# EAGLE board Tube Screamer (EAGLE 9.6.2)
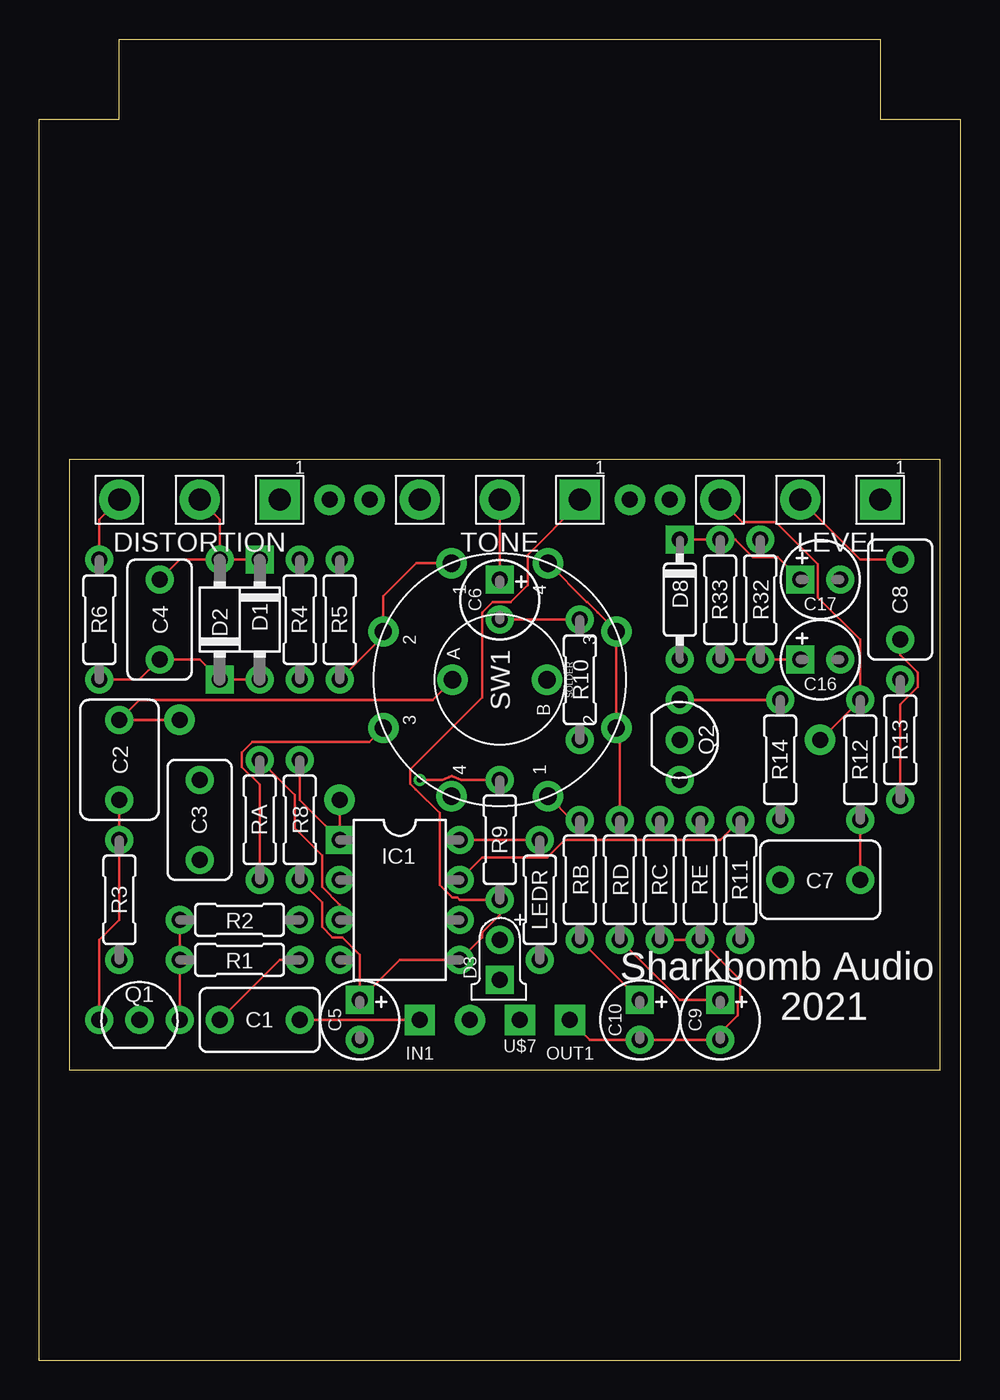
[diagram p0: board, top side]
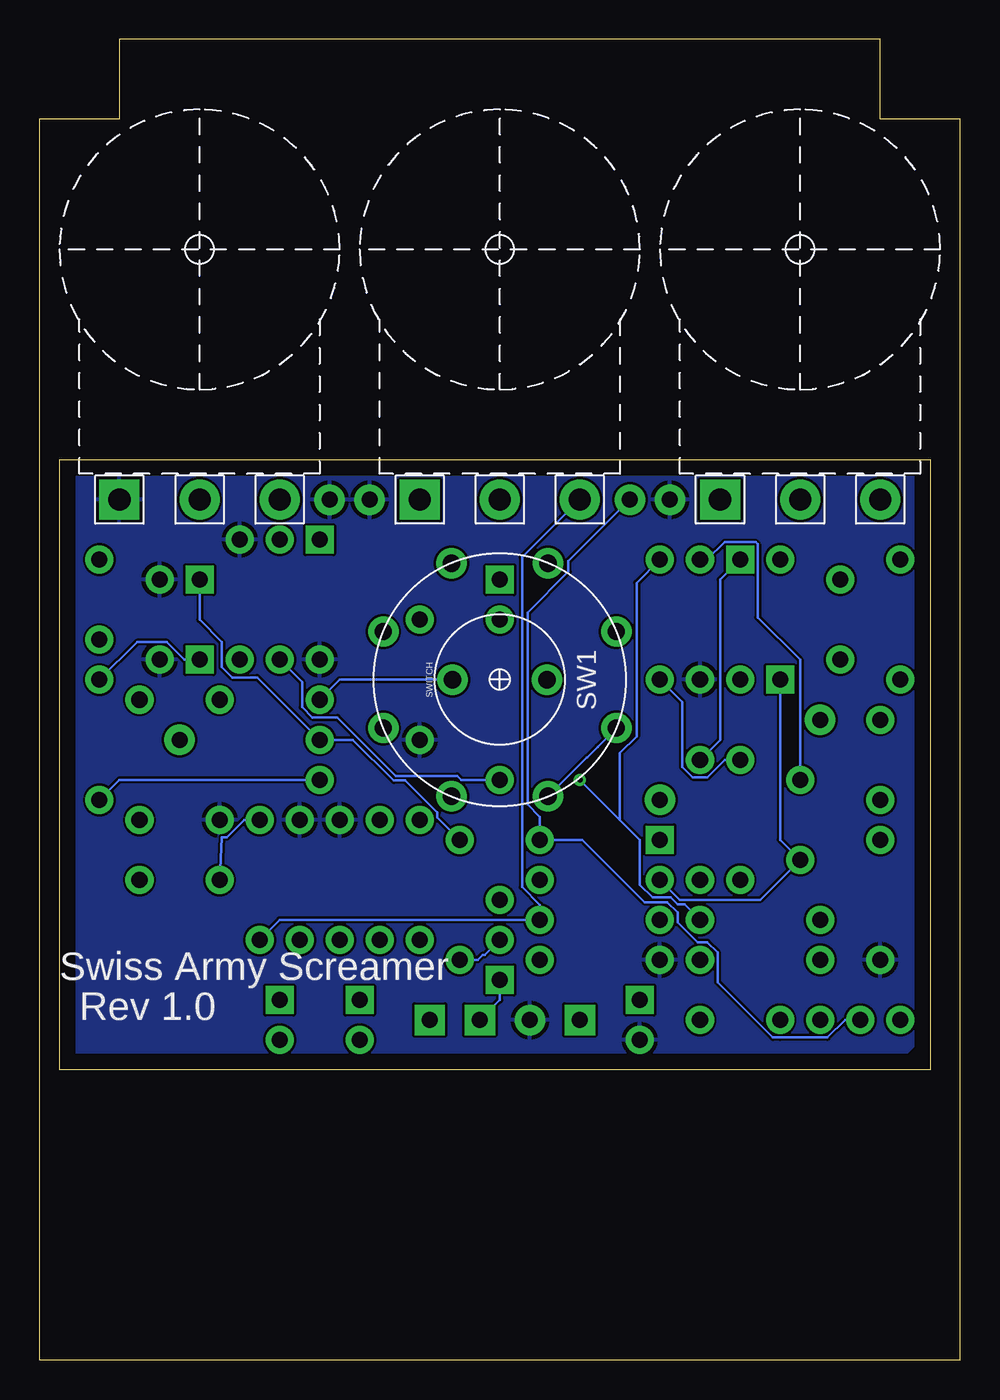
[diagram p1: board, bottom side, seen from below]

Size 55.23 x 38.73 mm. Coordinates in mm from the lower left corner, seen from the top.
Outline: 0,0 55.23,0 55.23,38.73 0,38.73 0,0
Copper layers (1*16): Top 0.035mm / dielectric 1.5mm / Bottom 0.035mm
Design rules "default": minimum track width 6mil, minimum drill 0.35mm, track to track 6mil, track to pad 6mil, pad to pad 6mil, via to via 6mil, smd to smd 6mil, copper to edge 40mil, drill to drill 6mil, minimum pad ring 10mil, minimum via ring 8mil, stop-mask expansion 4mil, vias tented up to drill 0mil, thermal gap 10mil

## Footprints (pad centres in the part's own frame; a part is rotated, then mirrored left to right if it is on the bottom)
0.2".MED = drill 1.016 pad 1.778: 1 -2.54,0; 2 2.54,0
0.2".LRG = drill 1.016 pad 1.778: 1 -2.54,0; 2 2.54,0
050_020_1 = drill 1.016 pad 1.778 square: + -1.27,0 | drill 1.016 pad 1.778: - 1.27,0
DO41-3 = drill 1.016 pad 1.778: A 3.81,0 | drill 1.016 pad 1.778 square: C -3.81,0
LED3MM = drill 1.016 pad 1.778: A -1.27,0 | drill 1.016 pad 1.778 square: K 1.27,0
DO35-3 = drill 1.016 pad 1.778: A 3.81,0 | drill 1.016 pad 1.778 square: C -3.81,0
16MM_B.MOUNT = drill 1.4 pad 2.54 square: 1 5.08,0 | drill 1.4 pad 2.54: 2 0,0; 3 -5.08,0
DIL08 = drill 1.016 pad 1.778 square: 1 -3.81,-3.81 | drill 1.016 pad 1.778: 2 -1.27,-3.81; 3 1.27,-3.81; 4 3.81,-3.81; 5 3.81,3.81; 6 1.27,3.81; 7 -1.27,3.81; 8 -3.81,3.81
SQUARE = drill 1.016 pad 1.93 square: 1 0,0
R0207/3 = drill 1.016 pad 1.778: 1 -3.81,0; 2 3.81,0
TO92 = drill 1.016 pad 1.778: 1 -2.54,0; 2 0,0; 3 2.54,0
2P4T.MINI = drill 1.1 pad 1.93: A 0,3; A1 7.391,3.061; A2 3.061,7.391; A3 -3.061,7.391; A4 -7.391,3.061; B 0,-3; B1 -7.391,-3.061; B2 -3.061,-7.391; B3 3.061,-7.391; B4 7.391,-3.061
PAD2 = drill 1.016 pad 1.93: P$1 0,0

## Placement (x,y rotation side)
C1  0.02  [0.2".MED]  12.07,3.18 0 top
C2  1uF  [0.2".LRG]  3.17,19.69 270 top
C3  0.047  [0.2".MED]  8.26,15.88 90 top
C4  51p  [0.2".MED]  5.71,28.58 270 top
C5  0.22  [050_020_1]  18.41,3.18 270 top
C6  0.22  [050_020_1]  27.3,29.84 270 top
C7  1uF  [0.2".LRG]  47.62,12.07 180 top
C8  0.1  [0.2".MED]  52.7,29.84 90 top
C9  10uF  [050_020_1]  41.27,3.18 270 top
C10  10uF  [050_020_1]  36.2,3.18 270 top
C16  47uF  [050_020_1]  47.62,26.04 0 top
C17  100uF  [050_020_1]  47.62,31.12 0 top
D1  ma150  [DO41-3]  12.07,28.58 270 top
D2  ma150  [DO41-3]  9.53,28.58 90 top
D3  LED3MM  [LED3MM]  27.3,6.98 270 top
D8  W03C  [DO35-3]  38.73,29.84 270 top
DISTORTION  A500K  [16MM_B.MOUNT]  8.26,36.2 0 top
E$1  [125B]  -1.91,-18.41 0 top  (outside the outline)
IC1  JNR4558  [DIL08]  20.95,10.8 270 top
IN1  IN  [SQUARE]  22.22,3.18 0 top
LEDR  4.7K  [R0207/3]  29.84,10.8 90 top
LEVEL  100K  [16MM_B.MOUNT]  46.35,36.2 0 top
OUT1  OUT  [SQUARE]  31.75,3.18 0 top
Q1  2sc1815  [TO92]  4.44,3.18 180 top
Q2  2sc1815  [TO92]  38.73,20.95 90 top
R1  1K  [R0207/3]  10.79,6.98 180 top
R2  510K  [R0207/3]  10.79,9.53 0 top
R3  10K  [R0207/3]  3.17,10.8 90 top
R4  4.7K  [R0207/3]  14.61,28.58 90 top
R5  10K  [R0207/3]  17.14,28.58 90 top
R6  51K  [R0207/3]  1.91,28.58 90 top
R8  1K  [R0207/3]  14.61,15.88 270 top
R9  10K  [R0207/3]  27.3,14.61 90 top
R10  220  [R0207/3]  32.38,24.77 270 top
R11  1K  [R0207/3]  42.55,12.07 90 top
R12  1K  [R0207/3]  50.16,19.69 90 top
R13  510K  [R0207/3]  52.7,20.95 90 top
R14  10K  [R0207/3]  45.09,19.69 90 top
R32  10K  [R0207/3]  43.81,29.84 270 top
R33  10K  [R0207/3]  41.27,29.84 90 top
RA  220  [R0207/3]  12.07,15.88 90 top
RB  100  [R0207/3]  32.38,12.07 270 top
RC  10K  [R0207/3]  37.46,12.07 90 top
RD  470  [R0207/3]  34.92,12.07 270 top
RE  100K  [R0207/3]  40,12.07 90 top
SW1  [2P4T.MINI]  27.3,24.77 90 top
TONE  20kB  [16MM_B.MOUNT]  27.3,36.2 0 top
U$1  PADS.RND_NL  [PAD2]  19.05,36.2 0 top
U$2  PADS.RND_NL  [PAD2]  16.51,36.2 0 top
U$3  PADS.RND_NL  [PAD2]  35.56,36.2 0 top
U$4  PADS.RND_NL  [PAD2]  38.1,36.2 0 top
U$5  PADS.RND_NL  [PAD2]  25.4,3.18 0 top
U$6  PADS.RND_NL  [PAD2]  6.99,22.23 0 top
U$7  LED+  [SQUARE]  28.57,3.18 180 top
U$8  PADS.RND_NL  [PAD2]  17.14,17.15 0 top
U$9  PADS.RND_NL  [PAD2]  47.62,20.95 0 top

## Library data of the parts
C1-C4 C7 C8 = caps-film
C5 C6 C9 C10 C16 C17 = caps-elec
D1-D3 D8 = diodes
DISTORTION LEVEL TONE = potentiometers
E$1 = enclosures
IC1 = integrated circuits
IN1 OUT1 U$1-U$9 = supply pins
LEDR R1-R6 R8-R14 R32 R33 RA RB RC RD RE = resistors
Q1 Q2 = transistors-BJT
SW1 = switches

## Nets
+9V: C17.+ D8.C IC1.8 LEDR.2 Q1.2 Q2.2 R33.2 U$1.P$1
GND: C5.- C16.- C17.- D8.A IC1.4 LEVEL.1 R3.1 R4.1 R10.2 R14.1 R32.1 RC.2 RE.2 U$2.P$1 U$3.P$1 U$4.P$1 U$5.P$1
IN: C1.2 IN1.1
N$1: C1.1 R1.1
N$2: Q1.1 R1.2 R2.1
N$3: C2.1 SW1.A U$6.P$1
N$4: C2.2 Q1.3 R3.2
N$5: RA.1 SW1.A3 SW1.A4
N$6: IC1.3 R5.1 RA.2 SW1.A1 SW1.A2
N$7: RD.1 SW1.B2 SW1.B3 SW1.B4
N$8: C3.1 C4.2 D1.A D2.C IC1.2 R6.1
N$9: C3.2 R4.2
N$10: C4.1 D1.C D2.A DISTORTION.2 IC1.1 R8.1 U$8.P$1
N$11: DISTORTION.3 R6.2
N$12: C5.+ IC1.5 R8.2 R9.1 TONE.1
N$13: IC1.6 R11.1 TONE.3
N$14: C7.2 IC1.7 R11.2
N$15: C6.+ TONE.2
N$16: C6.- R10.1
N$17: C7.1 R12.1
N$18: LEVEL.3 R12.2 U$9.P$1
N$19: C8.2 LEVEL.2
N$20: C8.1 Q2.1 R13.1
N$21: Q2.3 R14.2 SW1.B
N$22: RB.1 SW1.B1
N$23: D3.K U$7.1
N$24: C9.+ RD.2
N$25: C10.+ RB.2
N$26: D3.A LEDR.1
OUT: C9.- C10.- OUT1.1 RC.1 RE.1
VB: C16.+ R2.2 R5.2 R9.2 R13.2 R32.2 R33.1

## Tracks (layer width: path | path; a pad name or v marks a point on that pad's centre or on a via)
+9V
  Top 0.152: D8.C R33.2 42.23,33.66 43.35,32.54 44.93,32.54 C17.+ | LEDR.2 IC1.8
  Bottom 0.152: U$1.P$1 22.95,32.29 22.95,31.62 25.54,29.04 25.54,16.84 24.77,16.07 IC1.8 22.07,14.61 18.11,10.64 16.68,10.64 16.03,9.99 16.03,9.37 14.76,8.1 14.14,8.1 13.49,7.45 13.49,5.56 9.99,2.06 9.53,2.06 6.52,2.06 5.4,3.18 Q1.2 | C17.+ 46.35,28.58 44.93,27.15 44.93,25.57 44.28,24.92 42.7,24.92 Q2.2 36.63,20.95 34.03,18.36 33.29,18.36 31.27,16.34 31.27,16.03 LEDR.2
GND
  pour Bottom: 0.64,38.73 53.98,38.73 55.24,37.47 55.24,1.91 53.98,0.64 1.91,0.64 0.64,1.91
IN
  Top 0.152: C1.2 IN1.1
N$1
  Top 0.152: C1.1 13.34,6.98 R1.1
N$2
  Top 0.152: R2.1 R1.2 Q1.1
N$3
  Top 0.152: SW1.A 23.04,23.49 4.44,23.49 C2.1 U$6.P$1
N$4
  Top 0.152: Q1.3 1.91,8.26 3.17,9.53 R3.2 C2.2
N$5
  Top 0.152: SW1.A3 19.01,20.8 11.6,20.8 10.95,20.15 10.95,19.22 12.07,18.1 RA.1
  Bottom 0.152: SW1.A4 21.78,19.84 21.76,19.84 21.11,20.49 21.11,20.51 SW1.A3
N$6
  Top 0.152: SW1.A1 22,32.16 19.91,30.07 SW1.A2 19.91,27.53 R5.1 | RA.2 14.3,17.45 14.3,15.35 16.03,13.62 16.03,11.6 17.14,10.48 IC1.3
  Bottom 0.152: R5.1 15.72,23.34 15.72,19.22 15.07,18.57 14.14,18.57 13.02,19.69 RA.2
N$7
  Top 0.152: SW1.B4 32.83,29.69 32.85,29.69 33.5,29.04 33.5,29.02 SW1.B3 SW1.B2 34.92,21.48 RD.1
N$8
  Top 0.152: R6.1 4.44,24.77 C4.2 8.26,26.04 D2.C D1.A
  Bottom 0.152: IC1.2 15.88,10.8 10.79,10.8 C3.1 9.53,14.61 D2.C
N$9
  Bottom 0.152: C3.2 8.26,26.04 10.95,28.73 10.95,33.37 11.08,33.5 13.05,33.5 14.17,32.38 R4.2
N$10
  Top 0.152: DISTORTION.2 9.53,34.93 D2.A | D2.A D1.C | C4.1 6.99,32.38 D2.A | R8.1 14.61,17.15 IC1.1 U$8.P$1
  Bottom 0.152: D1.C 13.34,31.12 13.34,20.95 R8.1
N$11
  Top 0.152: R6.2 1.91,34.93 DISTORTION.3
N$12
  Top 0.152: TONE.1 32.38,36 29.07,32.69 29.07,30.78 27.98,29.69 26.84,29.69 26.19,29.04 26.19,23.65 21.62,19.08 21.62,18.16 21.97,17.81 21.98,17.81 23.49,16.3 23.49,11.75 24.3,10.95 24.61,10.95 24.77,10.8 R9.1 27.3,9.84 26.19,8.72 26.19,8.41 IC1.5 20.95,6.98 C5.+ 18.41,7.3 17.3,8.41 16.68,8.41 16.03,9.06 16.03,10.64 R8.2
N$13
  Bottom 0.152: R11.1 41.27,9.53 IC1.6 24.77,10.48 25.88,11.6 25.88,32.54 TONE.3
N$14
  Top 0.152: R11.2 41.27,14.61 31.43,14.61 30.31,13.49 26.19,13.49 IC1.7
  Bottom 0.152: C7.2 44.93,14.76 44.62,14.76 43.5,15.88 R11.2
N$15
  Top 0.152: TONE.2 C6.+
N$16
  Top 0.152: C6.- R10.1
N$17
  Top 0.152: R12.1 C7.1
N$18
  Top 0.152: LEVEL.3 42.7,34.77 44.8,34.77 47.47,32.1 47.47,30 50.16,27.3 R12.2 U$9.P$1
N$19
  Top 0.152: C8.2 50.16,32.38 LEVEL.2
N$20
  Top 0.152: C8.1 52.7,26.35 53.82,25.23 53.82,24.3 52.7,23.18 R13.1
  Bottom 0.152: Q2.1 51.44,18.41 R13.1
N$21
  Top 0.152: R14.2 Q2.3
  Bottom 0.152: Q2.3 37.46,24.77 SW1.B
N$22
  Top 0.152: RB.1 31.87,15.88 SW1.B1
N$23
  Bottom 0.152: U$7.1 27.3,4.45 D3.K
N$24
  Top 0.152: C9.+ 38.73,4.45 RD.2
N$25
  Top 0.152: C10.+ RB.2
N$26
  Bottom 0.152: D3.A 28.27,7.29 28.39,7.29 28.7,6.98 LEDR.1
OUT
  Top 0.152: OUT1.1 33.02,1.91 C10.- C9.- 41.27,2.34 42.39,3.46 42.39,4.29 42.55,4.45 42.55,5.71 RE.1 RC.1
VB  (via drill 0.35)
  Top 0.152: R33.1 R32.2 C16.+ | v22.22,18.41 23.64,18.41 24.24,18.67 24.85,18.41 R9.2
  Bottom 0.152: C16.+ 47.31,26.04 48.43,27.15 50.32,27.15 R13.2 | R9.2 29.76,18.41 30.01,18.67 33.91,18.67 37.62,22.38 39.2,22.38 39.85,23.03 39.85,24.61 R33.1 | R2.2 15.57,10.49 16,10.49 16.46,10.95 17.61,10.95 18.41,11.75 18.41,14.61 19.68,15.88 | 19.68,15.88 v22.22,18.41 | 19.68,15.88 19.68,20.11 18.62,21.17 18.62,30.91 R5.2

## Text on the board
tNames: Sharkbomb Audio | 2021
bNames: Swiss Army Screamer | Rev 1.0